# EAGLE board PCB_ODM (EAGLE 9.6.2)
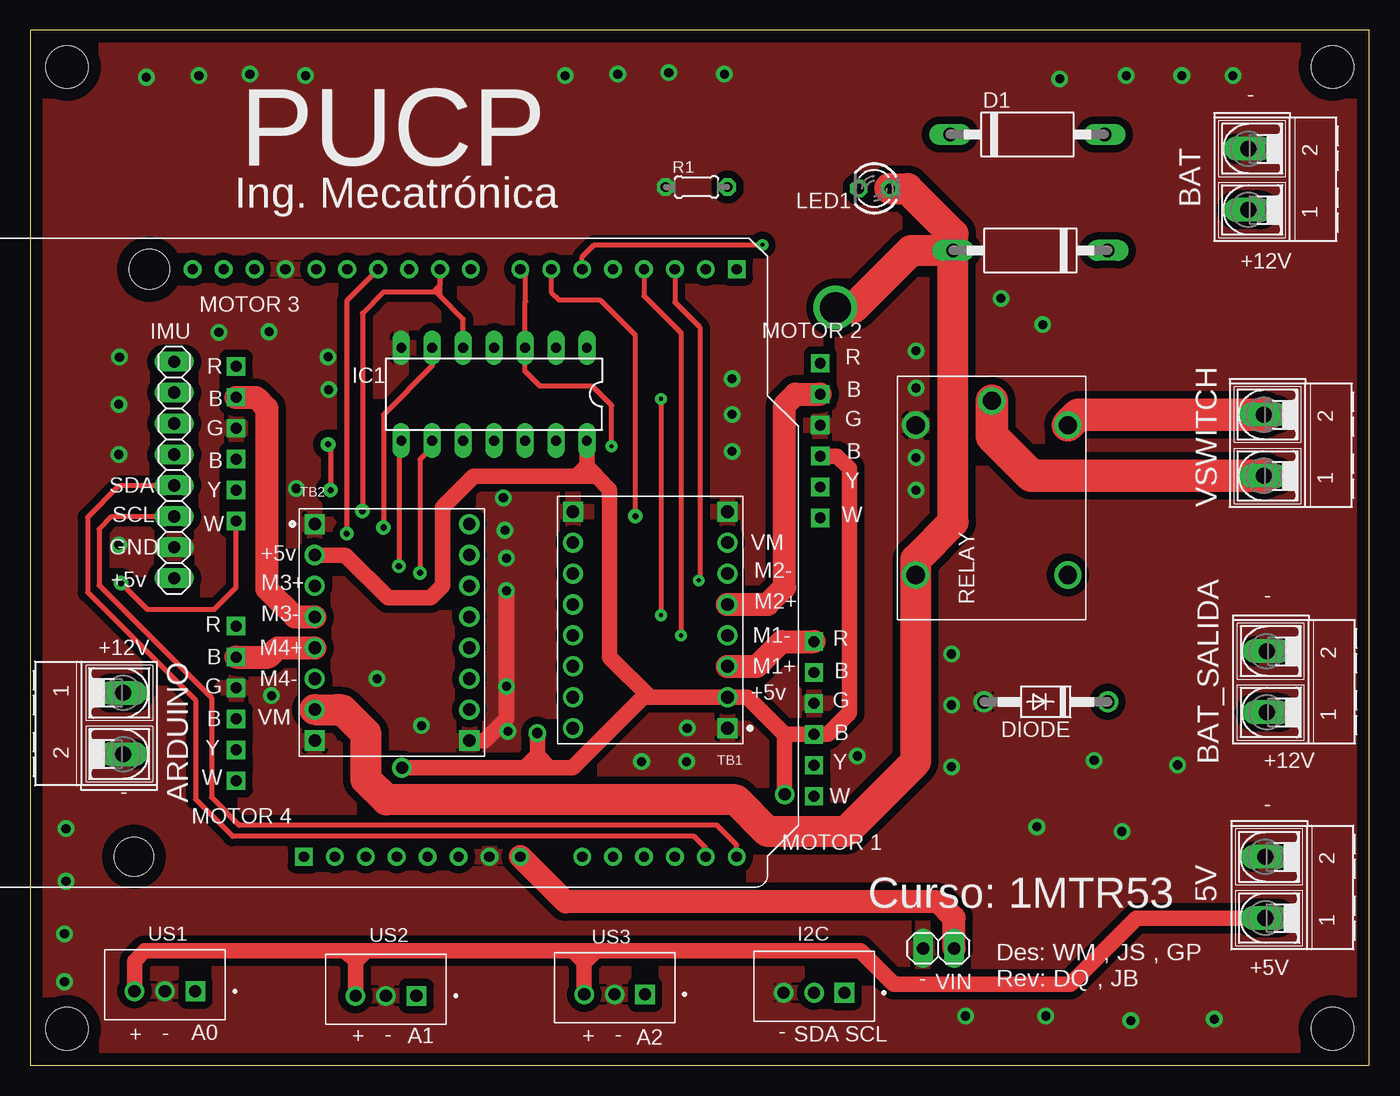
[diagram p0: board, top side]
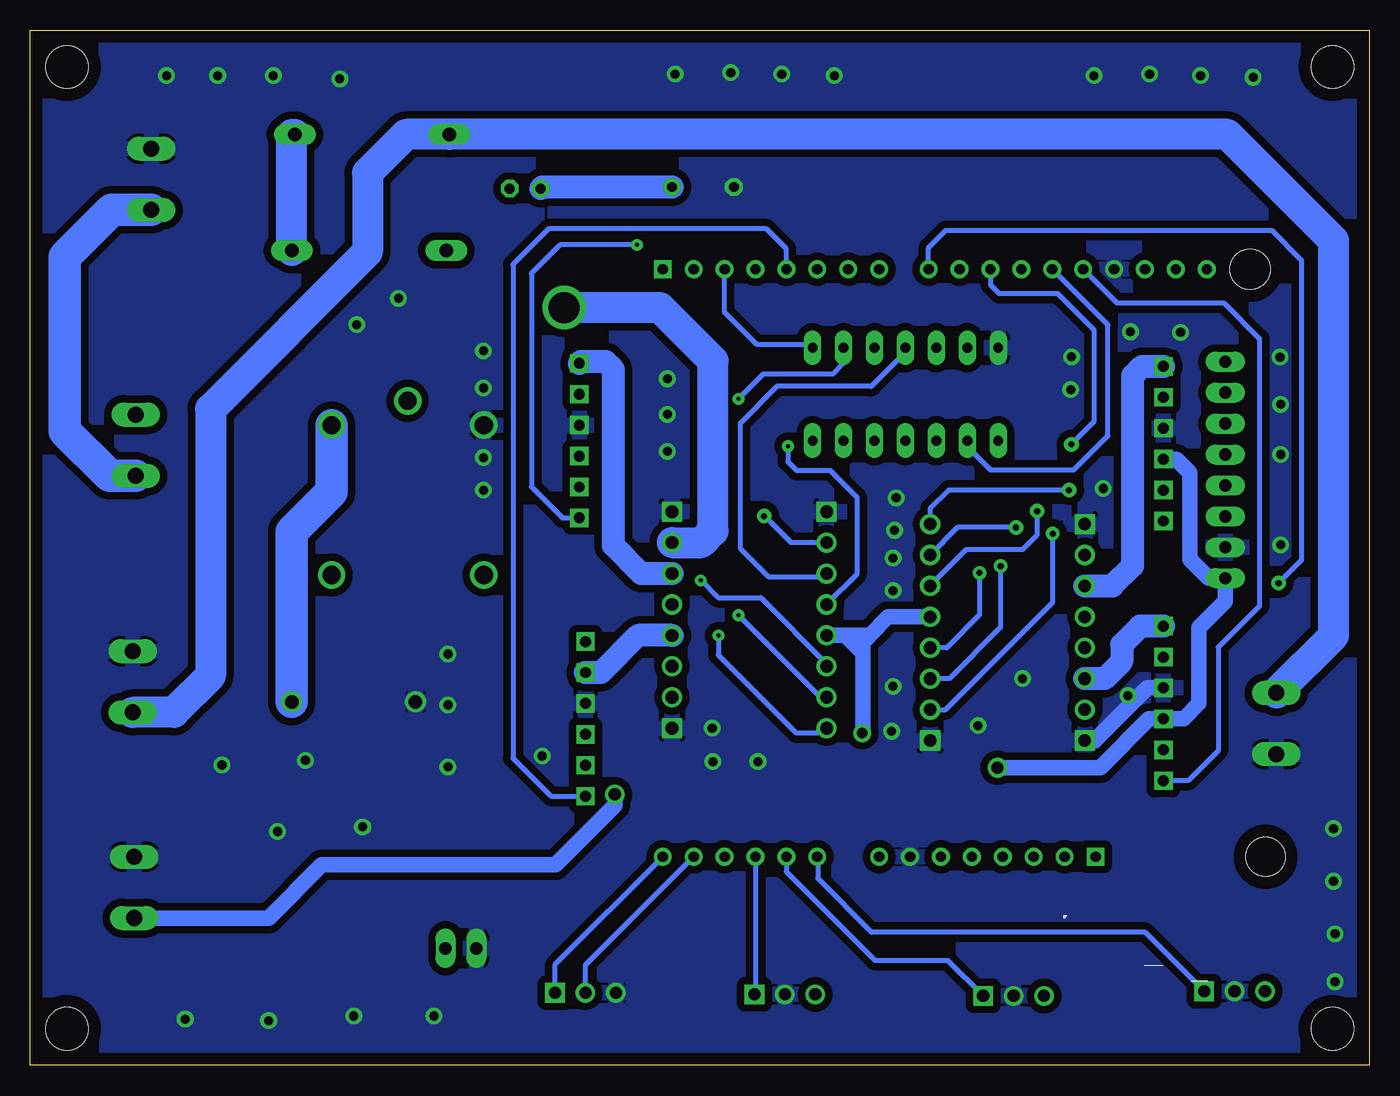
[diagram p1: board, bottom side, seen from below]

Size 110 x 85 mm. Coordinates in mm from the lower left corner, seen from the top.
Outline: 0,0 110,0 110,85 0,85 0,0
Copper layers (1*16): Top 0.035mm / dielectric 1.5mm / Bottom 0.035mm
Design rules "default *": minimum track width 6mil, minimum drill 0.35mm, track to track 12mil, track to pad 12mil, pad to pad 12mil, via to via 12mil, smd to smd 12mil, copper to edge 40mil, drill to drill 6mil, minimum pad ring 12mil, minimum via ring 12mil, stop-mask expansion 4mil, vias tented up to drill 0mil, thermal gap 10mil
Holes 3.5 mm at 3,82 107,82 107,3 3,3

## Footprints (pad centres in the part's own frame; a part is rotated, then mirrored left to right if it is on the bottom)
AK500/2-H = drill 1.321 long: 1 -2.515,0; 2 2.515,0
ARDUINO_A000066 = drill 0.85 square: JANALOG_1 -6.35,-24.15; JDIGITAL_1 29.21,24.11 | drill 0.85: JANALOG_2 -3.81,-24.15; JANALOG_3 -1.27,-24.15; JANALOG_4 1.27,-24.15; JANALOG_5 3.81,-24.15; JANALOG_6 6.35,-24.15; JANALOG_7 8.89,-24.15; JANALOG_8 11.43,-24.15; JANALOG_9 16.51,-24.15; JANALOG_10 19.05,-24.15; JANALOG_11 21.59,-24.15; JANALOG_12 24.13,-24.15; JANALOG_13 26.67,-24.15; JANALOG_14 29.21,-24.15; JDIGITAL_2 26.67,24.11; JDIGITAL_3 24.13,24.11; JDIGITAL_4 21.59,24.11; JDIGITAL_5 19.05,24.11; JDIGITAL_6 16.51,24.11; JDIGITAL_7 13.97,24.11; JDIGITAL_8 11.43,24.11; JDIGITAL_9 7.366,24.11; JDIGITAL_10 4.826,24.11; JDIGITAL_11 2.286,24.11; JDIGITAL_12 -0.254,24.11; JDIGITAL_13 -2.794,24.11; JDIGITAL_14 -5.334,24.11; JDIGITAL_15 -7.874,24.11; JDIGITAL_16 -10.414,24.11; JDIGITAL_17 -12.954,24.11; JDIGITAL_18 -15.494,24.11 | hole 3.3: -19.05,24.11 | hole 3.2: -20.32,-24.15
DO15-12 = drill 1.118 long: A 6.35,0; C -6.35,0
DO41-10 = drill 1.118: A 5.08,0; C -5.08,0
JST_B3B-XH-A = drill 1 square: 1 2.5,-0.525 | drill 1: 2 0,-0.525; 3 -2.5,-0.525
DIL14 = drill 0.813 long: 1 -7.62,-3.81; 2 -5.08,-3.81; 3 -2.54,-3.81; 4 0,-3.81; 5 2.54,-3.81; 6 5.08,-3.81; 7 7.62,-3.81; 8 7.62,3.81; 9 5.08,3.81; 10 2.54,3.81; 11 0,3.81; 12 -2.54,3.81; 13 -5.08,3.81; 14 -7.62,3.81
1X08 = drill 1.016 long: 1 -8.89,0; 2 -6.35,0; 3 -3.81,0; 4 -1.27,0; 5 1.27,0; 6 3.81,0; 7 6.35,0; 8 8.89,0
LED3MM = drill 0.813 octagon: A -1.27,0; K 1.27,0
MOTOR_JGB370 = drill 0.9 pad 1.422 square: +5V -2.54,0; ENCA -5.08,0; ENCB -7.62,0; GND 0,0; MOTOR+ 5.08,0; MOTOR- 2.54,0
0204/5 = drill 0.813 octagon: 1 -2.54,0; 2 2.54,0
RELAY12V = drill 1.5: 1 16,-14; 2 16,-1.5; C 18,-7.75; NC 3.7,-14; NO 3.7,-1.5
SHIELD_POLOLU-713 = drill 1.04 square: 1 -6.35,8.89; 8 -6.35,-8.89; 9 6.35,-8.89 | drill 1.04: 2 -6.35,6.35; 3 -6.35,3.81; 4 -6.35,1.27; 5 -6.35,-1.27; 6 -6.35,-3.81; 7 -6.35,-6.35; 10 6.35,-6.35; 11 6.35,-3.81; 12 6.35,-1.27; 13 6.35,1.27; 14 6.35,3.81; 15 6.35,6.35; 16 6.35,8.89
1X02 = drill 1.016 long: 1 -1.27,0; 2 1.27,0

## Placement (x,y rotation side)
5V  [AK500/2-H]  101.47,14.61 90 top
A1  A000066  [ARDUINO_A000066]  28.83,41.27 0 top
ARDUINO  [AK500/2-H]  7.62,28.07 270 top
BAT  [AK500/2-H]  100.08,72.77 90 top
BAT_SALIDA  [AK500/2-H]  101.6,31.5 90 top
D1  1N6A10  [DO15-12]  81.92,76.45 0 top
D2  1N6A10  [DO15-12]  82.17,66.93 180 top
DIODE  1N4004  [DO41-10]  83.44,29.84 180 top
I2C  B3B-XH-A  [JST_B3B-XH-A]  64.39,6.48 0 top
IC1  74LS04N  [DIL14]  38.1,55.12 180 top
IMU  [1X08]  11.81,48.9 90 top
LED1  TLLG4400  [LED3MM]  69.34,72.01 180 top
MOTOR1  MOTOR_JGB370  [MOTOR_JGB370]  64.39,29.72 90 top
MOTOR2  MOTOR_JGB370  [MOTOR_JGB370]  64.9,52.58 90 top
MOTOR3  MOTOR_JGB370  [MOTOR_JGB370]  16.89,52.32 90 top
MOTOR4  MOTOR_JGB370  [MOTOR_JGB370]  16.89,30.99 90 top
R1  430  [0204/5]  54.74,72.14 0 top
RELAY  [RELAY12V]  71.25,36.58 90 top
TB1  POLOLU-713  [SHIELD_POLOLU-713]  50.93,36.58 180 top
TB2  POLOLU-713  [SHIELD_POLOLU-713]  29.72,35.56 0 top
US1  B3B-XH-A  [JST_B3B-XH-A]  11.05,6.6 0 top
US2  B3B-XH-A  [JST_B3B-XH-A]  29.21,6.22 0 top
US3  B3B-XH-A  [JST_B3B-XH-A]  48.01,6.35 0 top
VIN  [1X02]  74.63,9.6 180 top
VSWITCH  [AK500/2-H]  101.35,50.93 90 top

## Library data of the parts
5V ARDUINO BAT BAT_SALIDA VSWITCH = con-ptr500; OC_FARNELL: unknown; OC_NEWARK: unknown
A1 = A000066; AVAILABILITY: Not in stock; CHECK_PRICES: https://www.snapeda.com/parts/ARDUINO%20UNO%20R3%20DIL/Arduino/view-part/?ref=eda; MF: Arduino; MP: ARDUINO UNO R3 DIL; PACKAGE: Non-Standard Arduino; PRICE: None; SNAPEDA_LINK: https://www.snapeda.com/parts/ARDUINO%20UNO%20R3%20DIL/Arduino/view-part/?ref=snap
D1 D2 DIODE = diode
I2C US1-US3 = B3B-XH-A; AVAILABILITY: In Stock; CHECK_PRICES: https://www.snapeda.com/parts/B3B-XH-A/JST+Sales+America+Inc./view-part/?ref=eda; DESCRIPTION: Connector Header Through Hole 3 position 0.098 (2.50mm); MF: JST Sales; MP: B3B-XH-A; PACKAGE: None; PRICE: None; SNAPEDA_LINK: https://www.snapeda.com/parts/B3B-XH-A/JST+Sales+America+Inc./view-part/?ref=snap
IC1 = 74xx-us
IMU VIN = pinhead
LED1 = led; MF: VISHAY SEMICONDUCTOR; OC_FARNELL: 1612435
MOTOR1-MOTOR4 = MOTOR_JGB370
R1 = rcl; SPICEPREFIX: R
RELAY = ModularRobot
TB1 TB2 = POLOLU-713; AVAILABILITY: Not in stock; CHECK_PRICES: https://www.snapeda.com/parts/POLOLU-713/Pololu/view-part/?ref=eda; DESCRIPTION: DC-motor driver; IC: TB6612FNG; 100kHz; 1A; Uin mot: 4.5; MF: Pololu; MP: POLOLU-713; PACKAGE: None; PRICE: None; SNAPEDA_LINK: https://www.snapeda.com/parts/POLOLU-713/Pololu/view-part/?ref=snap

## Nets
+3V3: A1.JANALOG_4
+5V: A1.JANALOG_5
+10V: ARDUINO.1 BAT_SALIDA.1 D1.C
+12V: D2.A LED1.A RELAY.NO TB1.7 TB2.7
AREF: A1.JDIGITAL_16
DIR1: A1.JDIGITAL_3 IC1.1 TB1.14
DIR1_NEG: IC1.2 TB1.15
DIR2: A1.JDIGITAL_8 IC1.3 TB1.12
DIR2_NEG: IC1.4 TB1.11
DIR3: A1.JDIGITAL_10 IC1.5 TB2.14
DIR3_NEG: IC1.6 TB2.15
DIR4: A1.JDIGITAL_13 IC1.9 TB2.12
DIR4_NEG: IC1.8 TB2.11
ENC1: A1.JDIGITAL_5 MOTOR1.ENCB
ENC2: A1.JDIGITAL_6 MOTOR2.ENCB
ENC3: A1.JDIGITAL_9 MOTOR3.ENCB
ENC4: A1.JDIGITAL_14 MOTOR4.ENCB
GND: 5V.2 A1.JANALOG_7 A1.JDIGITAL_15 ARDUINO.2 BAT.2 BAT_SALIDA.2 DIODE.A I2C.3 IC1.7 IMU.2 MOTOR1.GND MOTOR2.GND MOTOR3.GND MOTOR4.GND R1.1 RELAY.2 TB1.1 TB1.8 TB1.9 TB2.1 TB2.8 TB2.9 US1.2 US2.2 US3.2 VIN.2
GND_2: A1.JANALOG_6
IOREF: A1.JANALOG_2
MOTOR1+: MOTOR1.MOTOR+ TB1.3
MOTOR1-: MOTOR1.MOTOR- TB1.4
MOTOR2+: MOTOR2.MOTOR+ TB1.6
MOTOR2-: MOTOR2.MOTOR- TB1.5
MOTOR3+: MOTOR3.MOTOR+ TB2.3
MOTOR3-: MOTOR3.MOTOR- TB2.4
MOTOR4+: MOTOR4.MOTOR+ TB2.6
MOTOR4-: MOTOR4.MOTOR- TB2.5
N$1: LED1.K R1.2
N$2: MOTOR2.ENCA
N$3: MOTOR3.ENCA
N$4: MOTOR4.ENCA
N$5: MOTOR1.ENCA
N$6: D1.A D2.C
PWM1: A1.JDIGITAL_4 TB1.16
PWM2: A1.JDIGITAL_7 TB1.10
PWM3: A1.JDIGITAL_11 TB2.16
PWM4: A1.JDIGITAL_12 TB2.10
SCL: A1.JANALOG_14 I2C.1 IMU.3
SDA: A1.JANALOG_13 I2C.2 IMU.4
US1: A1.JANALOG_9 US1.1
US2: A1.JANALOG_10 US2.1
US3: A1.JANALOG_11 US3.1
V_BAT: BAT.1 RELAY.C VSWITCH.1
VCC: 5V.1 IC1.14 IMU.1 MOTOR1.+5V MOTOR2.+5V MOTOR3.+5V MOTOR4.+5V TB1.2 TB1.13 TB2.2 TB2.13 US1.3 US2.3 US3.3
VIN: A1.JANALOG_8 VIN.1
VSWITCH: DIODE.C RELAY.1 VSWITCH.2

## Tracks (layer width: path | path; a pad name or v marks a point on that pad's centre or on a via)
+10V
  Bottom 2.54: ARDUINO.1 2.92,35.28 2.92,67.74 11.63,76.45 D1.C 79.15,76.45 82.3,73.3 82.3,66.8 95.2,53.9 95.2,32 98.22,28.98 BAT_SALIDA.1
+12V  (via drill 2.54)
  Top 2.54: v66.14,62.23 67.69,62.23 72.39,66.93 D2.A | TB2.7 25.22,29.21 25.62,29.19 27.58,27.23 27.58,23.47 29.26,21.79 57.96,21.79 60.57,19.19 66.99,19.19 72.75,24.94 RELAY.NO 72.75,41.53 75.82,44.6 D2.A | LED1.A 72.08,72.01 75.82,68.28 D2.A
  Bottom 2.54: TB1.7 54.86,42.93 53.9,43.89 53.9,57.86 58.27,62.23 v66.14,62.23
DIR1  (via drill 0.35)
  Top 0.406: A1.JDIGITAL_3 52.96,62.67 55.02,60.61 55.02,39.93 v54.91,39.83
  Bottom 0.406: IC1.1 45.97,59.18 50.29,59.18 52.96,61.85 A1.JDIGITAL_3 | v54.91,39.83 53.49,38.41 49.99,38.41 44.58,32.99 TB1.14
DIR1_NEG  (via drill 0.35)
  Top 0.406: v51.82,54.74 v51.82,36.96
  Bottom 0.406: IC1.2 43.18,57.66 44.07,56.77 49.78,56.77 v51.82,54.74 | v51.82,36.96 45.09,30.23 TB1.15
DIR2  (via drill 0.35)
  Top 0.406: 47.78,50.85 v47.75,50.85 47.75,54.2 46.18,55.78 41.86,55.78 40.64,57 IC1.3 40.64,62.69 40.69,62.74 40.69,64.95 A1.JDIGITAL_8
  Bottom 0.406: v47.75,50.85 47.75,49.58 47.03,48.86 44.29,48.86 42.09,46.67 42.09,40.33 TB1.12
DIR2_NEG
  Bottom 0.406: IC1.4 38.1,58.55 40.89,55.75 48.64,55.75 51.69,52.7 51.69,42.47 49.35,40.13 44.83,40.13 TB1.11
DIR3  (via drill 0.5 pad 1.2)
  Top 0.406: IC1.5 35.56,61.29 33.66,63.2 | 33.66,63.2 A1.JDIGITAL_10 33.66,64.06 33.12,63.52 | 33.12,63.52 29.03,63.52 27.28,61.77 v27.28,45.52 | 33.12,63.52 33.33,63.52 33.66,63.2
  Bottom 0.406: v27.28,45.52 27.28,43.54 28.45,42.37 33.07,42.37 TB2.14
DIR3_NEG  (via drill 0.5 pad 1.2)
  Top 0.406: IC1.6 33.02,57.45 29.01,53.44 v29.01,44.17
  Bottom 0.406: TB2.15 33.81,44.17 v29.01,44.17
DIR4  (via drill 0.5)
  Top 0.406: IC1.9 33.02,50.77 32,49.76 v32,40.44
  Bottom 0.406: IC1.9 33.02,50.8 31.11,48.9 24.26,48.9 21.46,51.69 21.46,60.81 A1.JDIGITAL_13 | v32,40.44 32,36.98 34.7,34.29 TB2.12
DIR4_NEG  (via drill 0.5)
  Top 0.406: IC1.8 30.28,51.1 v30.28,41
  Bottom 0.406: TB2.11 34.49,31.75 30.28,35.97 v30.28,41
ENC1
  Bottom 0.406: A1.JDIGITAL_5 47.88,67.06 49.53,68.71 67.44,68.71 70.36,65.79 70.36,25.22 67.23,22.1 MOTOR1.ENCB
ENC2  (via drill 0.35)
  Top 0.406: A1.JDIGITAL_6 45.34,66.4 46.33,67.39 v60.15,67.39
  Bottom 0.406: MOTOR2.ENCB 66.29,44.96 68.83,47.5 68.83,65.05 66.5,67.39 v60.15,67.39
ENC3  (via drill 0.5 pad 1.2)
  Top 0.406: MOTOR3.ENCB 16.89,39.24 15.06,37.41 9.63,37.41 v7.44,39.6
  Bottom 0.406: A1.JDIGITAL_9 36.2,67.16 34.78,68.58 8,68.58 5.56,66.14 5.56,41.48 v7.44,39.6
ENC4
  Bottom 0.406: A1.JDIGITAL_14 20.72,62.61 11.94,62.61 9.02,59.69 9.02,37.72 12.39,34.34 12.39,25.83 14.86,23.37 MOTOR4.ENCB
GND  (via drill 0.75, 0.75 pad 1.2)
  Top 1.27: TB2.9 37.34,26.67 39.12,28.45 v39.12,38.99
  Bottom 1.27: TB2.8 22.55,26.67 18.24,30.99 MOTOR4.GND
  other vias: 2.92,19.43 9.53,81.15 13.84,81.28 18.03,81.41 22.61,81.28 2.92,15.11 2.79,10.79 2.79,6.86 76.83,4.04 83.44,4.04 90.42,3.66 97.28,3.78 19.81,30.35 7.26,50.16 7.26,54.28 7.32,58.17 38.86,46.61 38.99,43.94 39.12,41.66 82.7,19.58 89.69,19.2 94.26,24.66 87.4,25.04 75.69,24.51 75.69,29.59 75.69,33.78 57.66,50.42 57.66,53.47 57.66,56.39 84.58,81.03 90.04,81.28 94.61,81.28 98.81,81.28 53.98,27.69 67.94,25.4 24.46,58.19 21.84,47.37 19.61,60.25 24.51,55.5 15.49,60.2 39.12,31.11 39.24,27.43 72.77,49.91 72.77,47.24 72.77,55.63 72.77,58.67 79.76,62.99 83.19,60.83 43.94,81.28 48.26,81.41 52.45,81.53 57.02,81.41 32.13,27.89 28.47,31.75 53.92,24.94 50.22,24.94 7.26,42.75
  pour Bottom (isolate 0.61): -4.06,87.63 -4.06,-6.1 -3.3,-6.86 113.41,-6.86 119.38,-0.89 119.38,84.96 115.82,88.52 -3.3,88.52 -4.19,87.63
  pour Top (isolate 0.61): -7.49,89.28 -7.49,-5.84 -3.3,-10.03 117.22,-10.03 127.76,0.51 127.76,89.28 121.41,95.63 -4.57,95.63 -7.49,92.71 -7.49,89.41 -7.37,89.28
MOTOR1+
  Top 1.905: TB1.3 59.69,32.77 61.72,34.8 MOTOR1.MOTOR+
MOTOR1-
  Bottom 1.905: TB1.4 60.07,35.31 63.12,32.26 MOTOR1.MOTOR-
MOTOR2+
  Bottom 1.905: TB1.6 59.82,40.39 62.1,42.67 62.1,57.15 62.74,57.78 64.77,57.78 MOTOR2.MOTOR+
MOTOR2-
  Top 1.905: TB1.5 60.58,37.85 61.98,39.24 61.98,54.23 62.87,55.12 MOTOR2.MOTOR-
MOTOR3+
  Bottom 1.905: TB2.3 21.08,39.37 19.43,41.02 19.43,56.64 18.67,57.4 MOTOR3.MOTOR+
MOTOR3-
  Top 1.905: MOTOR3.MOTOR- 18.54,54.86 19.43,53.98 19.43,39.12 21.72,36.83 TB2.4
MOTOR4+
  Bottom 1.905: MOTOR4.MOTOR+ 18.8,36.07 20.32,34.54 20.32,33.15 21.72,31.75 TB2.6
MOTOR4-
  Top 1.905: MOTOR4.MOTOR- 19.56,33.53 20.32,34.29 TB2.5
N$1
  Bottom 1.905: LED1.K 67.94,72.14 R1.2
N$6
  Bottom 2.54: D2.C 88.52,76.45 D1.A
PWM1  (via drill 0.35)
  Top 0.406: A1.JDIGITAL_4 50.42,63.2 53.47,60.15 v53.47,35.31
  Bottom 0.406: v53.47,35.31 53.47,33.68 47.09,27.3 44.96,27.3 TB1.16
PWM2  (via drill 0.5 pad 1.2)
  Top 0.406: A1.JDIGITAL_7 42.8,63.5 43.43,62.87 46.79,62.87 49.71,59.94 v49.71,45.11
  Bottom 0.406: v49.71,45.11 49.66,45.11 47.47,42.93 TB1.10
PWM3  (via drill 0.5 pad 1.2)
  Top 0.406: v24.46,51 24.66,50.8 v24.66,47.24
  Bottom 0.406: A1.JDIGITAL_11 31.11,64.11 30.4,63.4 25.6,63.4 22.61,60.4 22.61,52.86 v24.46,51 | TB2.16 36.07,45.72 34.54,47.24 v24.66,47.24
PWM4  (via drill 0.5)
  Top 0.406: A1.JDIGITAL_12 25.98,62.79 v25.98,43.66
  Bottom 0.406: TB2.10 34.8,29.21 25.98,38.02 v25.98,43.66
SCL
  Top 0.406: A1.JANALOG_14 58.04,18.09 56.42,19.71 17.17,19.71 14.88,22 14.88,30.18 5.64,39.42 5.64,44.04 6.68,45.09 IMU.3
  Bottom 0.406: I2C.1 66.89,8.28 A1.JANALOG_14
SDA
  Top 0.406: IMU.4 7.32,47.62 4.7,45.01 4.7,38.84 13.56,29.97 13.56,21.84 16.61,18.8 54.51,18.8 55.5,17.81 A1.JANALOG_13
  Bottom 0.406: I2C.2 64.39,8.23 A1.JANALOG_13
US1
  Bottom 0.406: US1.1 18.39,10.92 40.87,10.92 45.3,15.35 45.3,17.09 A1.JANALOG_9
US2
  Bottom 0.406: US2.1 34.6,8.59 40.56,8.59 47.88,15.9 A1.JANALOG_10
US3
  Bottom 0.406: A1.JANALOG_11 50.42,5.91 US3.1
V_BAT
  Top 2.667: RELAY.C 79,51.66 82.25,48.41 VSWITCH.1
  Bottom 2.667: VSWITCH.1 103.5,48.41 107.19,52.09 107.19,66.4 103.33,70.26 BAT.1
VCC  (via drill 0.85, 1)
  Top 1.27: TB1.2 58.93,30.23 61.98,27.18 | 61.98,27.18 MOTOR1.+5V 65.53,27.18 67.31,28.96 67.31,49.02 66.29,50.04 MOTOR2.+5V | TB2.2 25.86,41.91 29.39,38.38 32.87,38.38 33.88,39.4 33.88,45.82 36.42,48.36 44.86,48.36 | 61.98,27.18 v61.98,22.25 | US3.3 45.51,8.49 | 44.6,9.4 45.51,8.49 | US2.3 26.71,8.52 | 27.58,9.4 44.6,9.4 | 27.58,9.4 26.71,8.52 | 27.58,9.4 25.84,9.4 | 25.84,9.4 9.4,9.4 8.55,8.55 US1.3 | 26.71,8.52 25.84,9.4 | TB1.2 50.9,30.23 47.6,33.53 47.6,47.27 46.51,48.36 | 46.51,48.36 45.72,49.15 IC1.14 45.72,49.23 44.86,48.36 | TB1.2 50.34,30.23 44.55,24.43 43.48,24.43 42.67,24.43 | 42.67,24.43 41.76,24.43 | v30.53,24.43 40.64,24.43 | 40.64,24.43 41.76,24.43 | 44.6,9.4 46.48,9.4 | 44.86,48.36 46.51,48.36 | 45.51,8.49 45.58,8.49 46.48,9.4 | 5V.1 90.88,12.09 85.45,6.66 70.97,6.66 68.22,9.4 46.48,9.4 | 41.76,24.43 41.66,24.54 41.66,25.45 | v41.66,27.28 41.66,25.45 | 41.66,25.45 40.64,24.43 | 41.66,25.45 42.67,24.43
  Bottom 1.27: MOTOR3.+5V 15.85,49.78 14.73,48.67 14.73,41.55 13.18,40.01 IMU.1 11.81,38.1 13.97,35.94 13.97,29.72 15.24,28.45 MOTOR4.+5V 18.09,28.45 22.1,24.43 v30.53,24.43 | v61.98,22.25 61.98,21.34 66.85,16.46 86.06,16.46 90.42,12.09 5V.1 | v41.66,27.28 41.6,27.33 41.6,33.88 | 41.6,33.88 41.6,34.75 | 41.6,34.75 41.02,35.33 | 41.02,35.33 39.52,36.83 TB2.13 | 41.6,34.75 42.16,35.31 | 42.16,35.31 TB1.13 43.03,35.31 41.6,33.88 | 41.02,35.33 42.14,35.33 42.16,35.31
VIN
  Top 1.905: A1.JANALOG_8 43.97,13.41 74.6,13.41 75.89,12.12 VIN.1
VSWITCH
  Top 2.667: VSWITCH.2 86.11,53.44 RELAY.1
  Bottom 2.667: DIODE.C 88.52,43.81 85.25,47.09 RELAY.1

## Text on the board
tPlace: - | PUCP | Ing. Mecatrónica | +12V | MOTOR 3 | MOTOR 2 | R | R | B | B | G | G | B | B | SDA | Y | Y | SCL | W | W | GND | VM | +5v | M2- | +5v | M3+ | - | M2+ | R | M3- | M1- | +12V | M4+ | R | B | M1+ | B | M4- | G | +5v | G | B | VM | B | Y | Y | +12V | W | - | W | - | MOTOR 4 | MOTOR 1 | Curso: 1MTR53 | - | +5V | Des: WM , JS , GP / Rev: DQ , JB | + | - | A0 | + | - | A1 | + | - | A2 | - | SDA | SCL